# Altium PCB SUBBOARD-sensors.PcbDoc (part 2 of 2)
Units mm, origin at the board's own origin, x right, y up, seen from the top; angles counter-clockwise.
Board outline 150 x 85 mm, 2 copper layers (Top Layer, Bottom Layer), stack 1.639 mm thick; 142 components, 91 nets, 388 pads, 124 vias.
Unrouted connection lines stored in the file: 3.
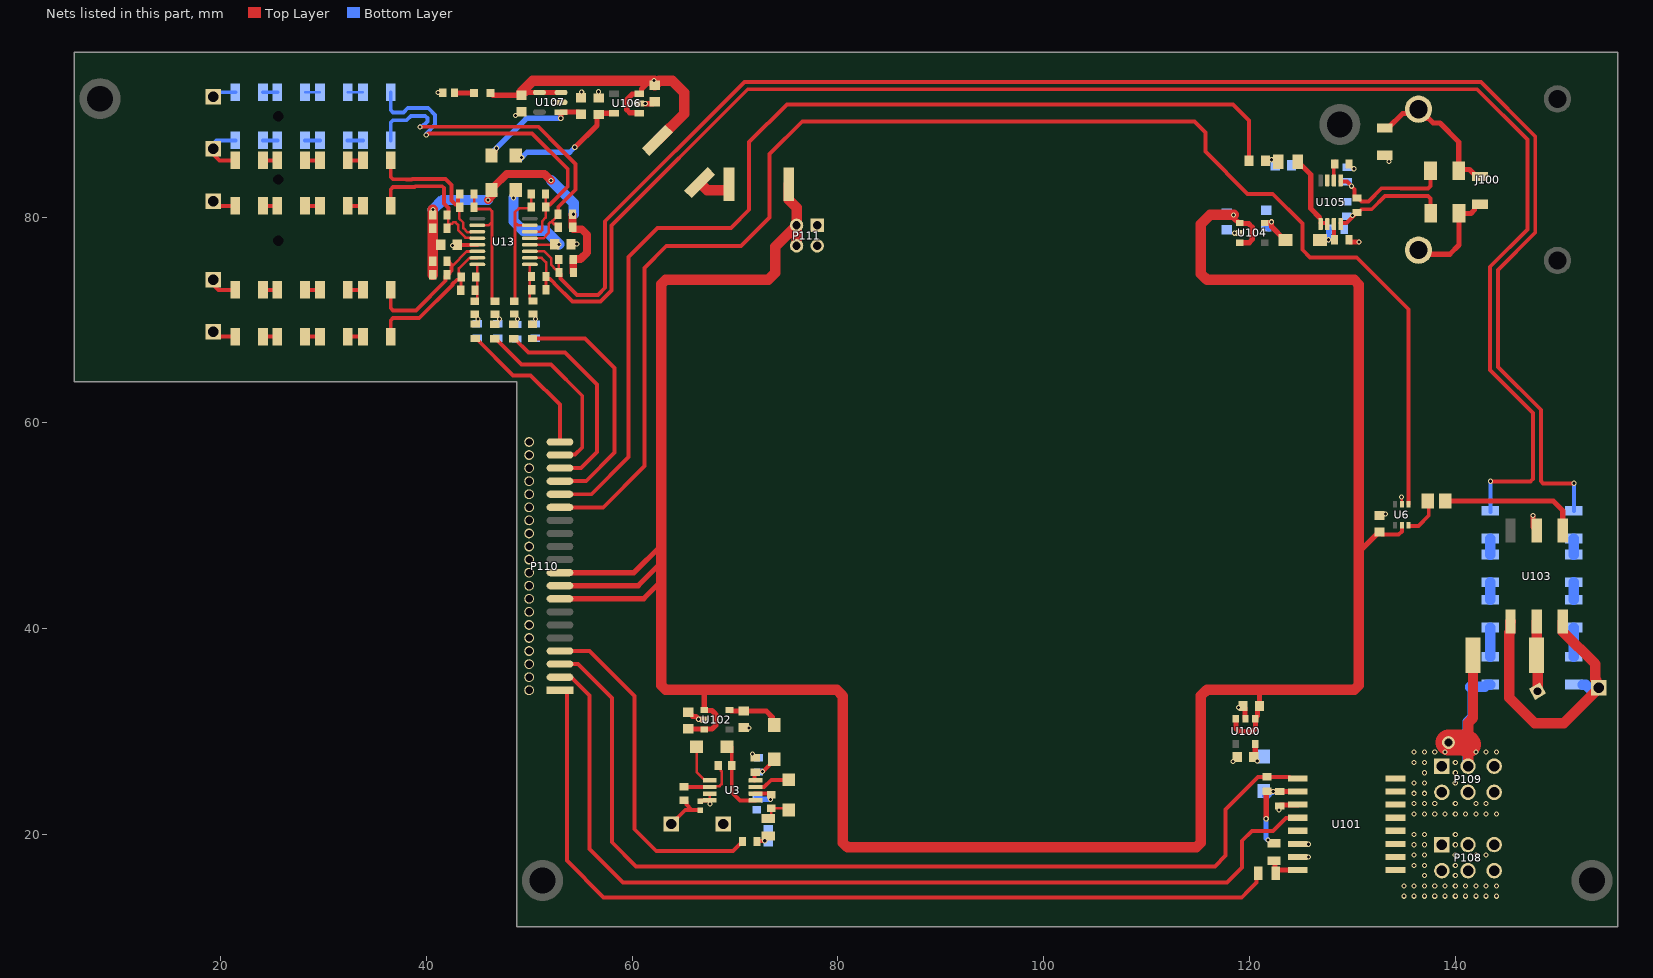
[diagram p2: the nets of this part, all layers, seen from the top]

## Part data (continued)
U107: library part CMP-04916-000008-1, "IC VREF SERIES 1.65V/3.3V 5SOT", Manufacturer="Texas Instruments", Max Junction Temp=+150°C, Max Supply Voltage=5.5V, Min Supply Voltage=3.32V, Nominal Supply Current=360uA, Output current=20mA, Output Voltage=1.65/3.3V, Package=DDC0005A, Temperature="-40°C to +125°C", Temperature Range High=+125°C, Temperature Range Low=-40°C, Automotive=No, Category=IC, ComponentLink2Description=Datasheet, ComponentLink2URL=http://www.ti.com/lit/ds/symlink/ref2033.pdf, Device Class L1="Integrated Circuits (ICs)", Device Class L2="Power Management ICs", Device Class L3="Voltage References", Digikey Description="IC VREF SERIES 1.65V/3.3V 5SOT", Height=1.1mm, Lead Free=Yes, Manufacturer Part Number=REF2033AIDDCR, Number of Outputs=2, Octopart=https://octopart.com/ref2033aiddcr-texas+instruments-46921199, Output Type=Fixed, Reference Type=Series, RoHS=TRUE, Standoff Height=0mm

## Free pads (board coordinates)
  round 0.5 hole 1 slot 18 at 0 deg unplated: *(25.588,77.697) *(25.588,83.653) *(25.588,89.812)

## Via types
v1: diameter 0.5, hole 0.3, Top Layer to Bottom Layer, 124 vias

## Nets (pads, with @x,y where several pads share a name; then routed paths per layer and width w, separated by ;. In a path a pad name is that pad's centre, name@x,y a point inside that pad or via, vN(x,y) a via of type N, cw(c..) or ccw(c..) an arc to the next point about the centre after c; other vN are vias at no path point)
Ch1_F: C123.2 R123.1 R128.2 U13.1 | length 3.7
  Top Layer w0.254: U13.1@50.044,75.405 50.044,72.085 50.289,71.84 R128.2@50.364,71.84
Ch1_N: C123.1 R123.2 R127.1 U13.2 | length 158.5
  Top Layer w0.254: U13.2@50.044,76.04 51.2,76.04 51.627,75.613 51.627,74.255 R123.2@51.614,74.242 ; R123.2@51.621,73.982 51.621,72.959 C123.1@51.627,72.953
  Top Layer w0.381: R123.2@51.614,74.242 51.614,74.142 51.774,73.982 52.026,73.982 52.422,73.587 52.422,73.556 54.18,71.798 56.917,71.798 57.992,72.873 57.992,79.198 71.225,92.431 142.123,92.431 147.011,87.543 147.011,78.815 143.378,75.182 143.378,65.136 147.548,60.966 147.548,54.551 147.325,54.328 v1(143.413,54.328)
  Bottom Layer w0.381: v1@143.366,54.378 143.407,54.337 R127.1@143.407,51.326
Ch1_O: C124.2 R128.1 R129.2
  other v1: 50.615,70.091
Ch1_P: C125.1 R133.1 R134.1 U13.3 | length 158.7
  Top Layer w0.254: U13.3@50.044,76.675 51.463,76.675 52.135,76.004 52.135,75.359 52.557,74.937 52.656,74.937 52.879,74.714 C125.1@52.879,74.614 ; R134.1@52.866,75.89 52.873,75.883 C125.1@52.873,74.72
  Top Layer w0.381: C125.1@52.879,74.614 53.028,74.465 53.028,74.028 54.622,72.433 56.654,72.433 57.357,73.136 57.357,79.599 70.898,93.14 142.492,93.14 147.773,87.859 147.773,78.499 144.14,74.867 144.14,65.451 148.31,61.281 148.31,54.348 148.534,54.125 148.542,54.133 v1(151.543,54.133)
  Bottom Layer w0.381: R133.1@151.525,51.454 151.525,53.273 151.543,53.291 v1(151.543,54.133)
Ch2_F: C126.2 R135.1 R140.2 U13.7 | length 13.3
  Top Layer w0.254: R140.2@48.528,71.826 48.611,71.909 48.611,79.497 ; U13.7@50.044,79.215 48.893,79.215 48.611,79.497 ; C126.2@50.181,82.261 50.184,82.258 50.184,80.983 R135.1@50.187,80.98 50.065,80.858 48.974,80.858 48.611,80.495 48.611,79.497
Ch2_N: C126.1 R135.2 R139.1 U13.6 | length 33.8
  Top Layer w0.254: U13.6@50.044,78.58 51.094,78.58 51.242,78.729 51.242,79.602 51.587,79.947 R135.2@51.587,80.98 51.584,80.983 51.584,81.239 51.584,82.258 C126.1@51.581,82.261
  Top Layer w0.381: v1(39.981,87.978) 40.013,87.978 40.182,88.147 50.248,88.147 53.729,84.666 53.729,82.98 51.988,81.239 51.747,81.239 51.587,81.08 R135.2@51.587,80.98
  Bottom Layer w0.381: R139.1@36.525,92.142 36.525,90.409 36.748,90.186 37.758,90.186 38.182,90.61 40.178,90.61 40.847,89.94 40.847,88.993 40.004,88.15 40.004,88.001 v1(39.981,87.978)
Ch2_O: C127.2 R140.1 R141.2
  other v1: 48.849,70.098
Ch2_P: C128.1 R145.1 R146.1 U13.5 | length 34.3
  Top Layer w0.254: U13.5@50.044,77.945 51.357,77.945 51.877,78.466 51.877,79.339 52.026,79.488 52.237,79.488 ; C128.1@52.785,80.278 52.785,80.178 52.237,79.63 52.237,79.488 ; R146.1@52.811,79.015 52.811,79.115 52.588,79.338 52.386,79.338 52.237,79.488
  Top Layer w0.381: v1(39.357,88.773) 39.37,88.786 50.875,88.786 52.97,86.691 52.97,86.687 54.491,85.166 54.491,82.665 52.812,80.986 52.812,80.305 C128.1@52.785,80.278
  Bottom Layer w0.381: R145.1@36.525,87.467 36.525,89.2 36.748,89.424 38.074,89.424 38.498,89.848 39.862,89.848 40.085,89.625 40.085,89.309 39.572,88.796 39.38,88.796 v1(39.357,88.773)
Ch3_F: C129.2 R147.1 R152.2 U13.10 | length 13.6
  Top Layer w0.254: C129.2@44.63,82.242 44.631,82.241 44.631,80.964 R147.1@44.632,80.963 44.801,80.794 46.152,80.794 46.374,80.572 46.374,79.532 ; U13.10@44.944,79.215 46.057,79.215 46.374,79.532 ; R152.2@46.652,71.823 46.597,71.823 46.374,72.046 46.374,79.532
Ch3_N: C129.1 R147.2 R151.1 U13.11 | length 15.1
  Top Layer w0.254: R147.2@43.232,80.963 43.184,80.915 43.184,79.863 43.59,79.457 43.59,78.941 44.008,78.523 44.26,78.523 44.318,78.58 U13.11@44.944,78.58
  Top Layer w0.381: R151.1@36.525,85.511 36.525,83.905 36.748,83.682 38.03,83.682 38.049,83.663 38.552,83.663 38.615,83.727 41.833,83.727 42.436,83.124 42.436,81.608 42.821,81.222 R147.2@43.072,81.222 ; C129.1@43.062,81.978 43.062,81.347 43.072,81.336 R147.2@43.072,81.222 ; R147.2@43.232,80.963 43.232,81.063 R147.2@43.072,81.222
Ch3_O: C130.2 R152.1 R153.2
  other v1: 47.083,70.085
Ch3_P: C131.1 R157.1 R158.1 U13.12 | length 14.5
  Top Layer w0.254: C131.1@42.13,80.222 42.13,79.132 42.374,79.376 42.486,79.376 42.614,79.504 42.824,79.504 43.082,79.247 43.082,78.731 43.798,78.015 44.249,78.015 44.318,77.945 U13.12@44.944,77.945
  Top Layer w0.381: R157.1@36.525,81.091 36.525,82.697 36.748,82.92 38.03,82.92 38.049,82.939 38.852,82.939 38.915,83.002 41.533,83.002 41.711,82.824 41.711,81.308 42.147,80.872 42.147,80.556 C131.1@42.13,80.538
Ch4_F: C132.2 R159.1 R164.2 U13.16 | length 3.7
  Top Layer w0.254: R164.2@44.703,71.823 44.721,71.823 44.944,72.046 U13.16@44.944,75.405
Ch4_N: C132.1 R159.2 R163.1 U13.15 | length 14.8
  Top Layer w0.254: C132.1@43.326,72.899 43.356,72.929 R159.2@43.356,74.05 ; R159.2@43.386,74.18 43.163,74.403 43.163,74.639 43.15,74.652 43.15,75.007 44.165,76.022 44.926,76.022 U13.15@44.944,76.04
  Top Layer w0.381: R163.1@36.525,68.208 36.525,69.961 36.748,70.184 39.298,70.184 42.532,73.418 42.532,73.501 42.543,73.501 42.962,73.92 43.227,73.92 43.356,74.05 43.386,74.08 R159.2@43.386,74.18
Ch4_O: C133.2 R164.1 R165.2
  other v1: 45.013,70.117
Ch4_P: C134.1 R169.1 R170.1 U13.14 | length 14.2
  Top Layer w0.254: C134.1@42.223,74.528 42.515,74.821 42.515,75.27 43.902,76.657 44.926,76.657 U13.14@44.944,76.675
  Top Layer w0.381: R169.1@36.525,72.922 36.525,71.169 36.748,70.946 38.982,70.946 41.853,73.817 41.853,74.24 C134.1@42.009,74.396 ; R170.1@42.209,75.711 42.209,75.611 42.442,75.378 42.442,74.837 42.223,74.618 C134.1@42.223,74.528
Ch_Ci_F: D101.2 R107.2 R111.2 | length 2.9
  Top Layer w0.254: R107.2@73.232,21.559 73.522,21.849 R111.2@73.522,22.547 75.02,22.547 D101.2@75.203,22.364
Ch_Ci_O: C103.2 R107.1 R108.2 | length 0.8
  Top Layer w0.381: R108.2@72.117,19.323 72.159,19.365 72.855,19.365 v1(72.878,19.388)
Ct_2: P106.1 R106.2 R109.2 | length 4.8
  Top Layer w0.381: P106.1@63.778,21.017 65.154,22.393 65.598,22.393 65.777,22.393 ; R106.2@64.914,23.345 65.06,23.345 65.262,23.143 65.262,22.909 65.777,22.393 ; R109.2@66.61,22.393 65.777,22.393
GND_5V: C100.1 C101.1 C102.1 C103.1 C104.1 C105.1 C106.1 C107.1 C108.1 C109.1 C110.1 C111.1 C112.1 C113.1 C115.1 C116.2 C117.1 C118.1 C119.1 C120.1 C121.1 C122.1 C124.1 C127.1 C130.1 C133.1 P107.1 P110.2 P110.4 P110.6 P110.8 P110.10 P110.12 P110.14 P110.16 P110.18 P110.20 P110.22 P110.24 P110.26 P110.28 P110.30 P110.32 P110.34 P110.36 P110.38 P110.40 P111.1 P111.3 R102.2 R109.1 R112.2 R121.1 R122.2 U3.3 U3.4 U6.2 U13.13 U100.2 U101.11 U101.14 U101.15 U102.2 U103.2 U104.2 U105.3 U106.2 U107.2 | length 13.1
  Top Layer w0.254: R109.1@66.61,23.293 R109.1@66.619,23.303 ; U3.3@67.54,23.962 67.54,23.393 U3.4@67.63,23.303 ; v1(134.757,52.791) 134.782,52.766 134.782,52.128 U6.2@134.806,52.104
  Top Layer w0.381: C118.1@43.116,77.31 U13.13@44.944,77.31 ; R109.1@66.619,23.303 U3.4@67.63,23.303
  Top Layer w0.508: C118.1@43.091,77.335 C118.1@43.116,77.31 ; v1(61.265,91.033) 61.991,91.033 C119.1@62.185,91.227 ; C107.1@65.437,31.879 65.487,31.879 65.891,31.475 66.184,31.475 v1(66.46,31.199) 66.952,31.199 U102.2@66.998,31.153 ; C106.1@70.833,30.398 C106.1@70.883,30.398 ; C101.1@119.374,32.484 119.57,32.288 119.57,31.943 119.572,31.94 119.572,31.288 U100.2@119.614,31.246 ; C102.1@122.93,22.777 123.006,22.853 124.643,22.853 U101.11@124.689,22.899 ; C112.1@129.66,77.794 129.66,77.694 129.756,77.598 130.626,77.598 v1(130.648,77.576) ; v1(147.556,50.996) 147.556,49.895 U103.2@147.909,49.541
  other v1: 125.747,17.814 125.714,19.051 122.862,22.396 67.544,22.969 118.41,27.102 71.701,27.836 71.366,30.351 118.924,32.353 133.198,51.141 42.522,77.242 54.608,77.404 118.546,78.442 130.137,84.704 133.56,85.419 48.656,89.876 52.4,91.148 41.129,92.109 55.087,92.172 56.705,92.191
I_csh_in: P108.1 P108.2 P108.3 P108.4 P108.5 P108.6 U101.1 U101.2 U101.3 U101.4
  other v1: 135,14 136,14 137,14 138,14 139,14 140,14 141,14 142,14 143,14 144,14 135,15 136,15 137,15 138,15 139,15 140,15 141,15 142,15 143,15 144,15 137,16 140,16 136,17 137,17 140,17 136,18 137,18 140,18 142,18 143,18 136,19 137,19 140,19 136,20 137,20 140,20
NetD100_1: D100.1 U3.1 | length 4.1
  Top Layer w0.254: D100.1@66.254,28.518 66.254,26.088 67.08,25.262 U3.1@67.54,25.262 ; D100.1@66.74,28.527 D100.1@66.755,28.527
NetD100_2: D100.2 R110.1 U3.5 | length 7.1
  Top Layer w0.381: D100.2@69.672,28.509 R110.1@69.672,26.71 69.672,24.093 70.465,23.3 71.978,23.3 U3.5@71.99,23.312
NetD101_1: D101.1 U3.7 | length 3.6
  Top Layer w0.381: U3.7@71.89,24.612 72.807,24.612 73.509,25.314 D101.1@75.203,25.314
NetLED100_1: LED100.1 R102.1 | length 1.9
  Top Layer w0.508: R102.1@42.725,92.091 42.735,92.08 44.618,92.08 LED100.1@44.629,92.07
NetR103_1: R103.1 R105.2 U101.16 | length 3.7
  Top Layer w0.508: R103.1@122.465,17.563 122.465,16.319 R105.2@122.554,16.23 122.554,16.378 122.725,16.549 U101.16@124.689,16.549
NetR106_1: R106.1 R110.2 U3.2 | length 5.8
  Top Layer w0.254: U3.2@67.532,24.62 67.612,24.7 68.487,24.7 68.686,24.899 68.686,26.122 68.62,26.188 68.62,26.462 R110.2@68.372,26.71 R110.2@68.372,26.66
  Top Layer w0.381: R106.1@65.027,24.628 65.035,24.62 U3.2@67.532,24.62
NetR111_1: R111.1 R112.1 U3.6 | length 3.2
  Top Layer w0.381: U3.6@71.89,23.962 R111.1@73.407,23.962
  Top Layer w0.508: R111.1@73.407,23.962 R111.1@73.522,23.847
  Bottom Layer w0.508: R112.1@72.108,23.702 72.195,23.789 72.6,23.384 72.633,23.417 v1(73.423,23.417)
NetR113_1: R113.1 U6.6 | length 3.9
  Top Layer w0.254: U6.6@135.456,50.054 U6.6@135.529,49.981 ; R113.1@137.319,52.404 R113.1@137.417,52.306
  Top Layer w0.381: U6.6@135.529,49.981 136.411,49.981 137.417,50.987 R113.1@137.417,52.306
NetR113_2: R113.2 U103.1 | length 13.7
  Top Layer w0.508: R113.2@139.019,52.404 149.517,52.404 150.449,51.472 U103.1@150.449,49.541
NetR114_1: R114.1 R115.2 U103.5 | length 6.4
  Top Layer w0.381: R115.2@147.909,36.442 R115.2@147.995,36.356
  Top Layer w1.016: R115.2@147.909,36.442 U103.5@147.909,40.691 ; R114.1@147.995,34.326 R115.2@147.995,36.356
NetR124_1: R124.1 R125.2 | length 2.8
  Bottom Layer w1.016: R124.1@143.406,37.268 R125.2@143.406,40.116
NetR125_1: R125.1 R126.2 | length 1.7
  Bottom Layer w1.016: R125.1@143.406,42.816 R126.2@143.406,44.504
NetR126_1: R126.1 R127.2 | length 1.6
  Bottom Layer w1.016: R126.1@143.406,47.204 R127.2@143.406,48.754
NetR130_1: R130.1 R131.2 | length 2.8
  Bottom Layer w1.016: R130.1@151.525,37.268 R131.2@151.525,40.116
NetR131_1: R131.1 R132.2 | length 1.7
  Bottom Layer w1.016: R131.1@151.525,42.816 R132.2@151.525,44.504
NetR132_1: R132.1 R133.2 | length 1.6
  Bottom Layer w1.016: R132.1@151.525,47.204 R133.2@151.525,48.754
NetR136_1: R136.1 R137.2 | length 1.4
  Bottom Layer w0.381: R136.1@24.12,92.142 R137.2@25.506,92.142
NetR137_1: R137.1 R138.2 | length 1.4
  Bottom Layer w0.254: R137.1@28.206,92.142 R138.2@29.643,92.142
NetR138_1: R138.1 R139.2 | length 1.5
  Bottom Layer w0.254: R138.1@32.343,92.142 R139.2@33.825,92.142
NetR142_1: R142.1 R143.2 | length 1.4
  Bottom Layer w0.381: R142.1@24.12,87.467 R143.2@25.506,87.467
NetR143_1: R143.1 R144.2 | length 1.4
  Bottom Layer w0.381: R143.1@28.206,87.467 R144.2@29.643,87.467
NetR144_1: R144.1 R145.2 | length 1.5
  Bottom Layer w0.381: R144.1@32.343,87.467 R145.2@33.825,87.467
NetR148_1: R148.1 R149.2 | length 1.4
  Top Layer w0.381: R148.1@24.12,85.511 R149.2@25.506,85.511
NetR149_1: R149.1 R150.2 | length 1.4
  Top Layer w0.381: R149.1@28.206,85.511 R150.2@29.643,85.511
NetR150_1: R150.1 R151.2 | length 1.5
  Top Layer w0.381: R150.1@32.343,85.511 R151.2@33.825,85.511
NetR154_1: R154.1 R155.2 | length 1.4
  Top Layer w0.381: R154.1@24.12,81.091 R155.2@25.506,81.091
NetR155_1: R155.1 R156.2 | length 1.4
  Top Layer w0.381: R155.1@28.206,81.091 R156.2@29.643,81.091
NetR156_1: R156.1 R157.2 | length 1.5
  Top Layer w0.381: R156.1@32.343,81.091 R157.2@33.825,81.091
NetR160_1: R160.1 R161.2 | length 1.4
  Top Layer w0.381: R160.1@24.12,68.382 R161.2@25.506,68.382
NetR161_1: R161.1 R162.2 | length 1.4
  Top Layer w0.381: R161.1@28.206,68.382 R162.2@29.643,68.382
NetR162_1: R162.1 R163.2 | length 1.5
  Top Layer w0.381: R162.1@32.343,68.382 R163.2@33.825,68.382
NetR166_1: R166.1 R167.2 | length 1.4
  Top Layer w0.381: R166.1@24.12,72.922 R167.2@25.506,72.922
NetR167_1: R167.1 R168.2 | length 1.4
  Top Layer w0.381: R167.1@28.206,72.922 R168.2@29.643,72.922
NetR168_1: R168.1 R169.2 | length 1.5
  Top Layer w0.381: R168.1@32.343,72.922 R169.2@33.825,72.922
TCK_N: J100.4 R119.1 R120.2 R121.2 | length 14.1
  Top Layer w0.508: R121.2@133.141,88.666 133.466,88.666 134.885,90.085 136.015,90.085 J100.4@136.426,90.496 ; J100.4@136.497,89.613 137.392,89.613 137.855,89.15 138.502,89.15 140.335,87.317 R120.2@140.335,84.492 140.47,84.627 141.385,84.627 142.052,83.96 R119.1@142.402,83.96
TCK_P: J100.3 R116.2 R119.2 | length 10
  Top Layer w0.508: J100.3@136.484,76.407 136.503,76.388 139.457,76.388 140.361,77.292 R116.2@140.361,80.368 141.51,80.368 141.856,80.714 141.856,81.064 142.052,81.26 R119.2@142.402,81.26
TCKF_N: C114.2 C116.1 R120.1 U105.1 | length 12.5
  Top Layer w0.381: U105.1@128.854,83.476 129.46,83.476 v1(129.926,83.01) 129.926,82.978 130.194,82.709 130.194,82.011 130.354,81.851 C114.2@130.454,81.851 130.554,81.851 130.873,81.532 131.562,81.532 132.841,82.811 134.712,82.811 134.717,82.806 137.362,82.806 137.585,83.029 R120.1@137.585,84.492
  Bottom Layer w0.381: C116.1@129.489,83.447 129.589,83.447 129.749,83.287 C116.1@129.749,83.187
TCKF_P: C113.2 C114.1 R116.1 U105.8 | length 11.4
  Top Layer w0.381: U105.8@128.854,79.426 129.429,79.426 130.194,80.191 130.194,80.291 130.354,80.451 C114.1@130.454,80.451 130.554,80.451 130.873,80.77 131.878,80.77 133.157,82.049 134.396,82.049 134.402,82.044 137.362,82.044 137.585,81.82 137.585,80.394 R116.1@137.611,80.368
  other v1: 130.011,80.145
V_csh_D: P110.3 U101.12 | length 93.8
  Top Layer w0.381: P110.3@51.976,35.287 54.069,35.287 55.85,33.506 55.85,18.587 59.096,15.341 117.827,15.341 119.274,16.788 119.274,19.392 120.226,20.344 122.286,20.344 123.525,21.583 U101.12@124.643,21.583
  Top Layer w0.508: U101.12@124.643,21.583 U101.12@124.689,21.629
V_cshR_D: U101.13
V_ct_D: P110.7 R108.1 | length 34.8
  Top Layer w0.381: P110.7@51.976,37.827 55.832,37.827 60.219,33.44 60.219,20.504 62.332,18.391 69.785,18.391 70.457,19.064 70.557,19.064 70.717,19.223 R108.1@70.717,19.323
V_dc_M: P101.1 R142.2 R148.2 | length 6.1
  Top Layer w0.381: P101.1@18.778,86.637 19.904,85.511 R148.2@21.42,85.511
  Bottom Layer w0.381: P101.1@18.778,86.637 19.608,87.467 R142.2@21.42,87.467
V_dc_N: P102.1 R136.2 | length 2.8
  Bottom Layer w0.381: P102.1@18.778,91.717 19.203,92.142 R136.2@21.42,92.142
V_dc_P: P100.1 R154.2 | length 2.8
  Top Layer w0.381: P100.1@18.778,81.557 19.244,81.091 R154.2@21.42,81.091
V_dcMN_D: P110.35 R141.1 | length 21.8
  Top Layer w0.381: R141.1@48.477,68.186 48.577,68.186 49.915,66.848 53.484,66.848 56.588,63.744 56.588,57.179 55.016,55.607 P110.35@51.976,55.607
V_dcPM_D: P110.37 R153.1 | length 19.3
  Top Layer w0.381: R153.1@46.628,68.191 46.728,68.191 49.224,65.695 52.088,65.695 55.14,62.643 55.14,57.629 54.428,56.917 53.016,56.917 P110.37@52.976,56.877 P110.37@51.976,56.877
V_o_D: P110.33 R129.1 | length 24.9
  Top Layer w0.381: R129.1@50.317,68.199 55.429,68.199 58.296,65.332 58.296,57.106 55.527,54.337 P110.33@51.976,54.337
V_o_N: P109.1 P109.2 P109.3 P109.4 P109.5 P109.6 R114.2 R115.1 R124.2 U101.5 U101.6 U101.7 U101.8 | length 22
  Top Layer w1.016: P109.3@141.238,26.637 141.238,28.739 141.238,30.84 141.722,31.324 R115.1@141.722,36.239
  Top Layer w2.54: R114.2@139.332,28.933 141.044,28.933 141.238,28.739
  Bottom Layer w1.016: P109.3@141.331,26.73 P109.3@141.238,26.637 141.23,26.645 141.23,30.952 141.713,31.435 141.713,34.012 141.435,34.29 141.435,34.326 141.461,34.352 142.881,34.352 143.097,34.568 R124.2@143.406,34.568
  other v1: 136,22 137,22 138,22 139,22 140,22 141,22 142,22 143,22 144,22 136,23 137,23 138,23 140,23 142,23 143,23 136,24 137,24 136,25 137,25 140,25 137,26 140,26 136,27 137,27 140,27 136,28 137,28 138,28 139,28 142,28 143,28 144,28
V_o_P: P103.1 R130.2 U103.4 U103.6 | length 28.7
  Top Layer w1.016: U103.4@145.369,40.691 145.361,40.683 145.361,39.715 145.261,39.615 145.261,33.278 147.725,30.814 150.541,30.814 153.696,33.969 153.696,34.015 P103.1@153.938,34.257 ; U103.6@150.449,40.691 150.457,40.683 150.457,39.715 153.601,36.571 153.601,35.094 153.696,35 153.696,34.167 P103.1@153.795,34.068
  Bottom Layer w1.016: 152.379,34.568 152.688,34.568 153.468,33.787 P103.1@153.938,34.257
V_tc_D: P110.31 R118.1 | length 103.5
  Top Layer w0.381: P110.31@51.976,53.067 56.025,53.067 59.649,56.691 59.649,76.137 62.454,78.942 69.584,78.942 71.362,80.72 71.362,87.296 75.03,90.964 118.403,90.964 119.958,89.409 R118.1@119.958,85.488
V_tc_F: R117.2 U105.5 U105.6 | length 7.5
  Top Layer w0.254: 126.813,79.978 126.904,79.887 U105.5@126.904,79.426
  Top Layer w0.381: U105.5@126.904,79.426 U105.6@127.554,79.426
  Top Layer w0.508: R117.2@124.69,85.399 125.952,84.137 125.952,80.839 126.813,79.978
V_tc_O: C115.2 R117.1 R118.2
  other v1: 122.154,85.578
V_x_D: P110.39 R165.1 | length 14.5
  Top Layer w0.381: R165.1@44.739,68.215 44.839,68.215 48.43,64.624 50.126,64.624 52.976,61.774 P110.39@52.976,58.147
V_x_N: P105.1 R160.2 | length 2.6
  Top Layer w0.381: P105.1@18.778,68.382 R160.2@21.42,68.382
V_x_P: P104.1 R166.2 | length 3.1
  Top Layer w0.381: P104.1@18.778,73.937 19.793,72.922 R166.2@21.42,72.922
Vbias: R122.1 U105.2 | length 2
  Top Layer w0.381: U105.2@128.204,83.476 128.191,83.489 128.191,84.063 128.187,84.067 128.187,85.273 R122.1@128.33,85.416
VCC_1V65: C122.2 L104.1 U107.1 | length 10.8
  Top Layer w0.508: L104.1@46.318,86.004 L104.1@46.664,86.35 ; v1(53.054,89.611) 53.083,89.64 U107.1@53.083,90.218 54.75,90.218 54.972,89.996 C122.2@55.022,89.996
  Bottom Layer w0.508: v1@46.629,86.527 49.707,89.605 53.048,89.605 v1(53.054,89.611)
  other v1: 46.804,86.702
VCC_1V65L1: C118.2 C125.2 C128.2 C131.2 C134.2 L104.2 R134.2 R146.2 R158.2 R170.2 | length 34.4
  Top Layer w0.508: C128.2@54.185,80.278 C128.2@54.198,80.265 ; R146.2@54.198,79.028 R146.2@54.211,79.015 54.211,78.915 R146.2@54.307,78.819 ; C125.2@54.273,74.62 C125.2@54.279,74.614 ; R134.2@54.273,75.896 R134.2@54.304,75.928
  Top Layer w0.762: v1(45.977,81.67) L104.2@46.532,82.224 ; L104.2@46.318,82.654 46.318,82.729 46.537,82.948 46.54,82.948 47.796,84.204 51.47,84.204 v1(52.105,83.569) ; R146.2@54.198,79.028 C128.2@54.198,80.265 ; C125.2@54.273,74.62 R134.2@54.273,75.896 ; R134.2@54.304,75.928 54.979,75.928 55.619,76.568 55.619,78.294 55.094,78.819 R146.2@54.307,78.819
  Top Layer w1.016: C134.2@40.609,74.396 R170.2@40.609,75.711 40.609,77.311 ; C131.2@40.609,80.2 R158.2@40.609,78.911 40.609,77.311 ; v1(40.626,80.739) 40.626,77.328 40.609,77.311
  Bottom Layer w1.016: v1(40.626,80.739) 41.557,81.67 v1(45.977,81.67) ; v1(52.105,83.569) 54.306,81.368 54.306,80.299 v1(54.292,80.285)
VCC_3V3_csh: C100.2 L100.2 U100.5 | length 1.3
  Top Layer w0.508: C100.2@120.406,27.522 120.554,27.67 120.554,28.785 U100.5@120.564,28.796
  other v1: 120.753,27.125
VCC_3V3_csh1: C102.2 L100.1 R103.2 R104.1 U101.10 | length 8.9
  Top Layer w0.508: v1(121.619,21.526) 121.619,24.124 R104.1@121.696,24.201 121.708,24.189 122.918,24.189 C102.2@122.93,24.177 122.934,24.173 124.685,24.173 U101.10@124.689,24.169
  Bottom Layer w0.508: L100.1@121.449,23.751 121.809,23.751 122.155,24.097 122.242,24.097 v1(122.304,24.159) ; v1@121.606,21.526 121.606,19.643 v1(121.8,19.449)
VCC_3V3_ct: C106.2 L101.1 U102.5 | length 5.3
  Top Layer w0.508: U102.5@69.448,32.103 69.523,32.103 69.628,31.998 C106.2@70.833,31.998 73.026,31.998 73.601,31.423 73.601,30.868 L101.1@73.813,30.656
VCC_3V3_ct2: C104.2 C105.2 L101.2 U3.8 | length 3.2
  Top Layer w0.254: C105.2@71.89,25.984 C105.2@71.961,26.055 72.09,26.184 v1@72.766,26.184 ; L101.2@73.813,27.231 L101.2@73.813,27.306
  Top Layer w0.381: U3.8@71.89,25.262 C105.2@71.89,25.984 ; v1@72.766,26.184 L101.2@73.813,27.231
  other v1: 72.656,26.108
VCC_3V3_op: C120.2 L103.1 U106.5 | length 12
  Top Layer w0.508: L103.1@48.673,85.941 48.673,86.016 L103.1@49.019,86.362 ; v1(54.416,86.794) 54.442,86.794 56.572,88.924 56.572,89.809 56.863,90.1 U106.5@58.232,90.1
  Bottom Layer w0.508: v1@49.133,85.666 49.773,86.306 53.928,86.306 v1(54.416,86.794)
  other v1: 49.256,85.789
VCC_3V3_tc: C109.2 L102.1 U104.5 | length 3.5
  Top Layer w0.508: U104.5@121.489,79.418 121.535,79.464 122.039,79.464 v1(122.124,79.549) 122.124,79.079 123.421,77.782 L102.1@123.496,77.782
  Bottom Layer w0.508: C109.2@121.699,78.994 C109.2@121.621,79.072 121.671,79.072 C109.2@121.867,78.876
VCC_3V3_tc1: C111.2 C112.2 L102.2 U105.7 | length 2.7
  Top Layer w0.381: C112.2@128.204,77.926 U105.7@128.204,79.426
  Top Layer w0.508: C112.2@128.204,77.926 C112.2@128.3,77.83
  Bottom Layer w0.508: v1(127.673,77.802) 127.702,77.831 127.702,78.731 C111.2@127.798,78.827
VCC_3V3L1: C117.2 L103.2 U13.4 | length 10.1
  Top Layer w0.254: U13.4@50.044,77.31 52.413,77.31 C117.2@52.457,77.355
  Bottom Layer w1.016: v1(48.462,81.877) 48.462,79.596 49.392,78.666 51.574,78.666 v1(52.885,77.355)
VCC_5V: C101.2 C107.2 C108.2 C110.2 C119.2 C121.2 LED100.2 P110.15 P110.17 P110.19 P111.2 P111.4 R100.1 R100.2 R101.1 R101.2 U6.5 U100.1 U100.3 U102.1 U102.3 U104.1 U104.3 U106.1 U106.3 U107.3 U107.4 | length 322
  Top Layer w0.381: C108.2@132.63,49.393 132.881,49.142 134.488,49.142 134.806,49.46 U6.5@134.806,50.054
  Top Layer w0.508: LED100.2@46.229,92.07 46.46,91.839 C121.2@49.23,91.839 49.426,92.035 49.691,92.035 49.774,92.118 U107.4@50.983,92.118 U107.3@53.083,92.118 ; P110.15@51.976,42.907 61.11,42.907 62.826,44.623 ; P110.17@51.976,44.177 60.577,44.177 62.826,46.426 62.826,46.515 ; P110.19@51.976,45.447 60.172,45.447 62.826,48.101 ; U106.1@60.682,90.1 60.636,90.146 59.765,90.146 59.467,90.444 59.467,91.333 59.494,91.36 59.494,91.449 60.01,91.965 60.647,91.965 U106.3@60.682,92 60.857,92 60.903,92.046 60.903,92.453 61.64,93.19 C119.2@61.822,93.19 ; C119.2@62.099,92.741 C119.2@62.185,92.827 ; C107.2@65.437,30.279 65.475,30.241 66.96,30.241 U102.3@66.998,30.203 67.044,30.249 67.744,30.249 67.822,30.327 67.835,30.327 68.132,30.624 68.132,31.668 ; 67.183,34.052 66.998,33.867 U102.1@66.998,32.103 67.044,32.057 67.743,32.057 68.082,31.718 ; v1(118.454,80.227) 118.454,79.929 119.01,79.372 119.913,79.372 120.262,79.024 120.262,77.816 119.964,77.518 U104.3@119.039,77.518 ; U100.3@118.664,31.246 118.674,31.235 118.674,30.309 118.972,30.012 120.277,30.012 120.574,30.309 120.574,31.235 U100.1@120.564,31.246 120.61,31.292 120.61,31.367 120.782,31.539 120.782,32.292 C101.2@120.974,32.484 120.974,33.972 121.064,34.062 ; 130.63,47.324 130.63,47.443 132.58,49.393 C108.2@132.63,49.393 ; 130.63,54.853 130.63,55.074
  Top Layer w1.016: C121.2@49.201,92.117 50.339,93.255 C119.2@62.149,93.255 ; C119.2@62.185,92.827 62.613,93.255 63.874,93.255 65.046,92.083 65.046,90.058 R100.1@62.456,87.468 ; 62.826,46.426 62.826,44.623 62.826,34.498 63.272,34.052 67.183,34.052 79.861,34.052 80.456,33.457 80.456,19.21 80.924,18.742 114.824,18.742 115.27,19.188 115.27,33.467 115.865,34.062 121.064,34.062 130.184,34.062 130.63,34.508 130.63,47.324 ; 62.826,46.515 62.826,48.101 62.826,73.47 63.272,73.916 73.214,73.916 73.893,74.595 73.893,77.13 P111.2@75.974,79.211 ; R100.2@66.557,83.367 67.296,82.628 R101.2@69.388,82.628 ; R101.1@75.208,83.196 75.225,83.179 75.225,81.694 76.003,80.916 76.003,79.24 P111.2@75.974,79.211 ; P111.4@75.974,77.214 P111.2@75.974,79.211 ; P111.2@75.974,79.214 P111.2@75.974,79.211 ; v1(118.454,80.227) 116.167,80.227 115.27,79.33 115.27,74.511 115.865,73.916 130.164,73.916 130.63,73.45 130.63,55.074 ; 130.63,47.443 130.63,54.853
  other v1: 62.128,93.276
X_csh_FOC_O: P110.5 R104.2 U101.9 | length 95.1
  Top Layer w0.381: P110.5@51.976,36.557 54.709,36.557 58.014,33.252 58.014,19.244 60.358,16.9 116.626,16.9 117.674,17.948 117.674,22.439 120.836,25.601 R104.2@121.696,25.601 U101.9@123.877,25.601
  Top Layer w0.508: U101.9@124.039,25.439 U101.9@124.689,25.439
X_csh_OC_I: P110.1 R105.1 | length 86.9
  Top Layer w0.381: P110.1@52.976,34.017 53.489,34.017 53.649,33.857 53.649,17.449 57.22,13.878 119.247,13.878 119.965,14.596 120.683,15.314 R105.1@120.683,16.002
X_dsc_I: P110.29 U6.1 | length 143
  Top Layer w0.381: P110.29@51.976,51.797 57.181,51.797 61.18,55.796 61.18,75.076 63.305,77.201 70.556,77.201 73.34,79.985 73.34,86.123 76.524,89.307 114.646,89.307 115.724,88.229 115.724,86.364 119.82,82.268 122.258,82.268 125.145,79.381 125.145,76.832 125.886,76.091 130.418,76.091 135.456,71.053 U6.1@135.456,52.104
pads on no net: J100.1 J100.2 MH100.* MH101.* MH102.* MH103.* P110.9 P110.11 P110.13 P110.21 P110.23 P110.25 P110.27 U6.3 U6.4 U13.8 U13.9 U100.4 U102.4 U103.3 U104.4 U105.4 U106.4 U107.5

## Polygon pours and split planes (outlines as drawn)
I_csh_in on Top Layer "I_csh_in_L-01_P-001" (solid, pour order 5): 133.214,20.73 133.295,20.73 145.072,20.73 145.072,14.523 144.096,13.547 134.48,13.547 134.078,13.949 134.078,15.053 134.48,15.455 135.802,15.455 135.975,15.628 135.975,15.829 135.975,16.064 135.804,16.235 133.214,16.235 133.214,20.709
V_o_N on Top Layer "I_csh_out_L-01_P-001" (solid, pour order 4): 133.239,21.296 133.239,21.28 145.07,21.28 145.07,27.607 143.681,28.996 135.571,28.996 134.799,28.224 134.799,26.888 135.332,26.355 136.411,26.355 136.583,26.183 136.583,25.91 136.394,25.721 133.239,25.721 133.239,21.348
GND_5V on Bottom Layer "GND_5V_L-04_P-001" (solid, pour order 1): 35.841,96.017 126.128,96.017 126.128,86.364 133.937,86.364 133.882,73.598 136.188,71.292 154.66,71.292 154.66,50.698 141.227,50.698 136.487,45.958 136.487,33.006 132.898,29.417 132.898,11.017 35.841,11.017
I_csh_in on Bottom Layer "I_csh_in_L-04_P-001" (solid, pour order 6): 133.248,20.73 133.295,20.73 145.072,20.73 145.072,14.523 144.096,13.547 134.48,13.547 134.078,13.949 134.078,15.053 134.48,15.455 135.802,15.455 135.975,15.628 135.975,15.829 135.975,16.064 135.804,16.235 133.214,16.235 133.214,20.709 133.214,20.73
V_o_N on Bottom Layer "I_csh_out_L-04_P-001" (solid, pour order 3): 133.239,21.303 133.239,21.28 145.07,21.28 145.07,27.607 143.681,28.996 135.571,28.996 134.799,28.224 134.799,26.888 135.332,26.355 136.411,26.355 136.583,26.183 136.583,25.91 136.394,25.721 133.239,25.721 133.239,21.348

## Keep-outs
Keep-Out Layer:
  rectangle: 5.813,11.017 48.943,64.017
  rectangle: 126.273,11.34 132.929,29.119
  region: 81.167,73.154 81.167,87.524 114.508,87.524 114.508,84.724 114.508,73.154 129.848,73.154 129.868,73.134 129.868,34.824 114.518,34.824 114.508,34.814 114.508,19.504 81.167,19.504 81.167,34.814 63.588,34.814 63.588,73.154
  region: 5.778,96.017 5.778,94.017 155.778,94.017 155.778,96.017
  region: 46.778,11.017 155.778,11.017 155.778,13.017 46.778,13.017

## Silkscreen, mask and mechanical layers (free items; w line width, h text height)
Top Overlay:
  text "H" at 7.072,77.08 h12
  text "Sensores" at 139.611,65.741 h1
  text "v. 1.0" at 139.631,64.281 h1
  text "AHWV/LSZ" at 139.681,62.681 h1
  text "F-IT 18I0090" at 139.856,58.981 h1
  text "H" at 145.946,18.684 h12
Board:
  lines w0.254: 5.778,64.017 5.778,96.017 ; 5.778,64.017 48.778,64.017 ; 5.778,64.017 48.778,64.017 ; 5.778,64.017 5.778,96.017 ; 5.778,96.017 155.778,96.017 ; 5.778,96.017 155.778,96.017 ; 48.778,11.017 155.778,11.017 ; 48.778,11.017 48.778,64.017 ; 48.778,11.017 48.778,64.017 ; 48.778,11.017 155.778,11.017 ; 155.778,11.017 155.778,96.017 ; 155.778,11.017 155.778,96.017 ; 63.861,35.079 63.861,72.879 81.538,72.879 81.538,87.284 114.218,87.284 114.218,72.879 129.611,72.879 129.611,35.079 114.218,35.079 114.218,19.774 81.538,19.774 81.538,35.079 63.861,35.079

## Dimensions
51.278,15.517 to 153.278,15.517 on Dimensions
51.278,15.517 to 48.778,11.017 on Dimensions
48.778,11.017 to 51.278,15.517 on Dimensions
153.278,15.517 to 155.778,11.017 on Dimensions
153.278,15.517 to 155.778,11.017 on Dimensions
8.278,91.517 to 5.778,96.017 on Dimensions
8.278,91.517 to 5.778,96.017 on Dimensions
128.778,89.017 to 155.778,96.017 on Dimensions
128.778,89.017 to 155.778,96.017 on Dimensions
19.278,73.937 to 19.278,68.857 on Dimensions
49.976,34.017 to 48.778,11.017 on Dimensions
71.624,83.572 to 5.778,96.017 on Dimensions
155.778,96.017 to 155.778,11.017 on Dimensions
5.778,64.017 to 48.778,64.017 on Dimensions
5.778,64.017 to 48.778,11.017 on Dimensions
5.778,96.017 to 5.778,64.017 on Dimensions
5.778,96.017 to 155.778,96.017 on Dimensions